# Altium PCB PCB1.PcbDoc
Units mm, origin at the board's own origin, x right, y up, seen from the top; angles counter-clockwise.
Board outline 46.45 x 39.85 mm, 4 copper layers (Top Layer, Int1 (GND), Int2 (PWR), Bottom Layer), stack 1.57 mm thick; 36 components, 27 nets, 175 pads, 20 vias.
Unrouted connection lines stored in the file: 1.
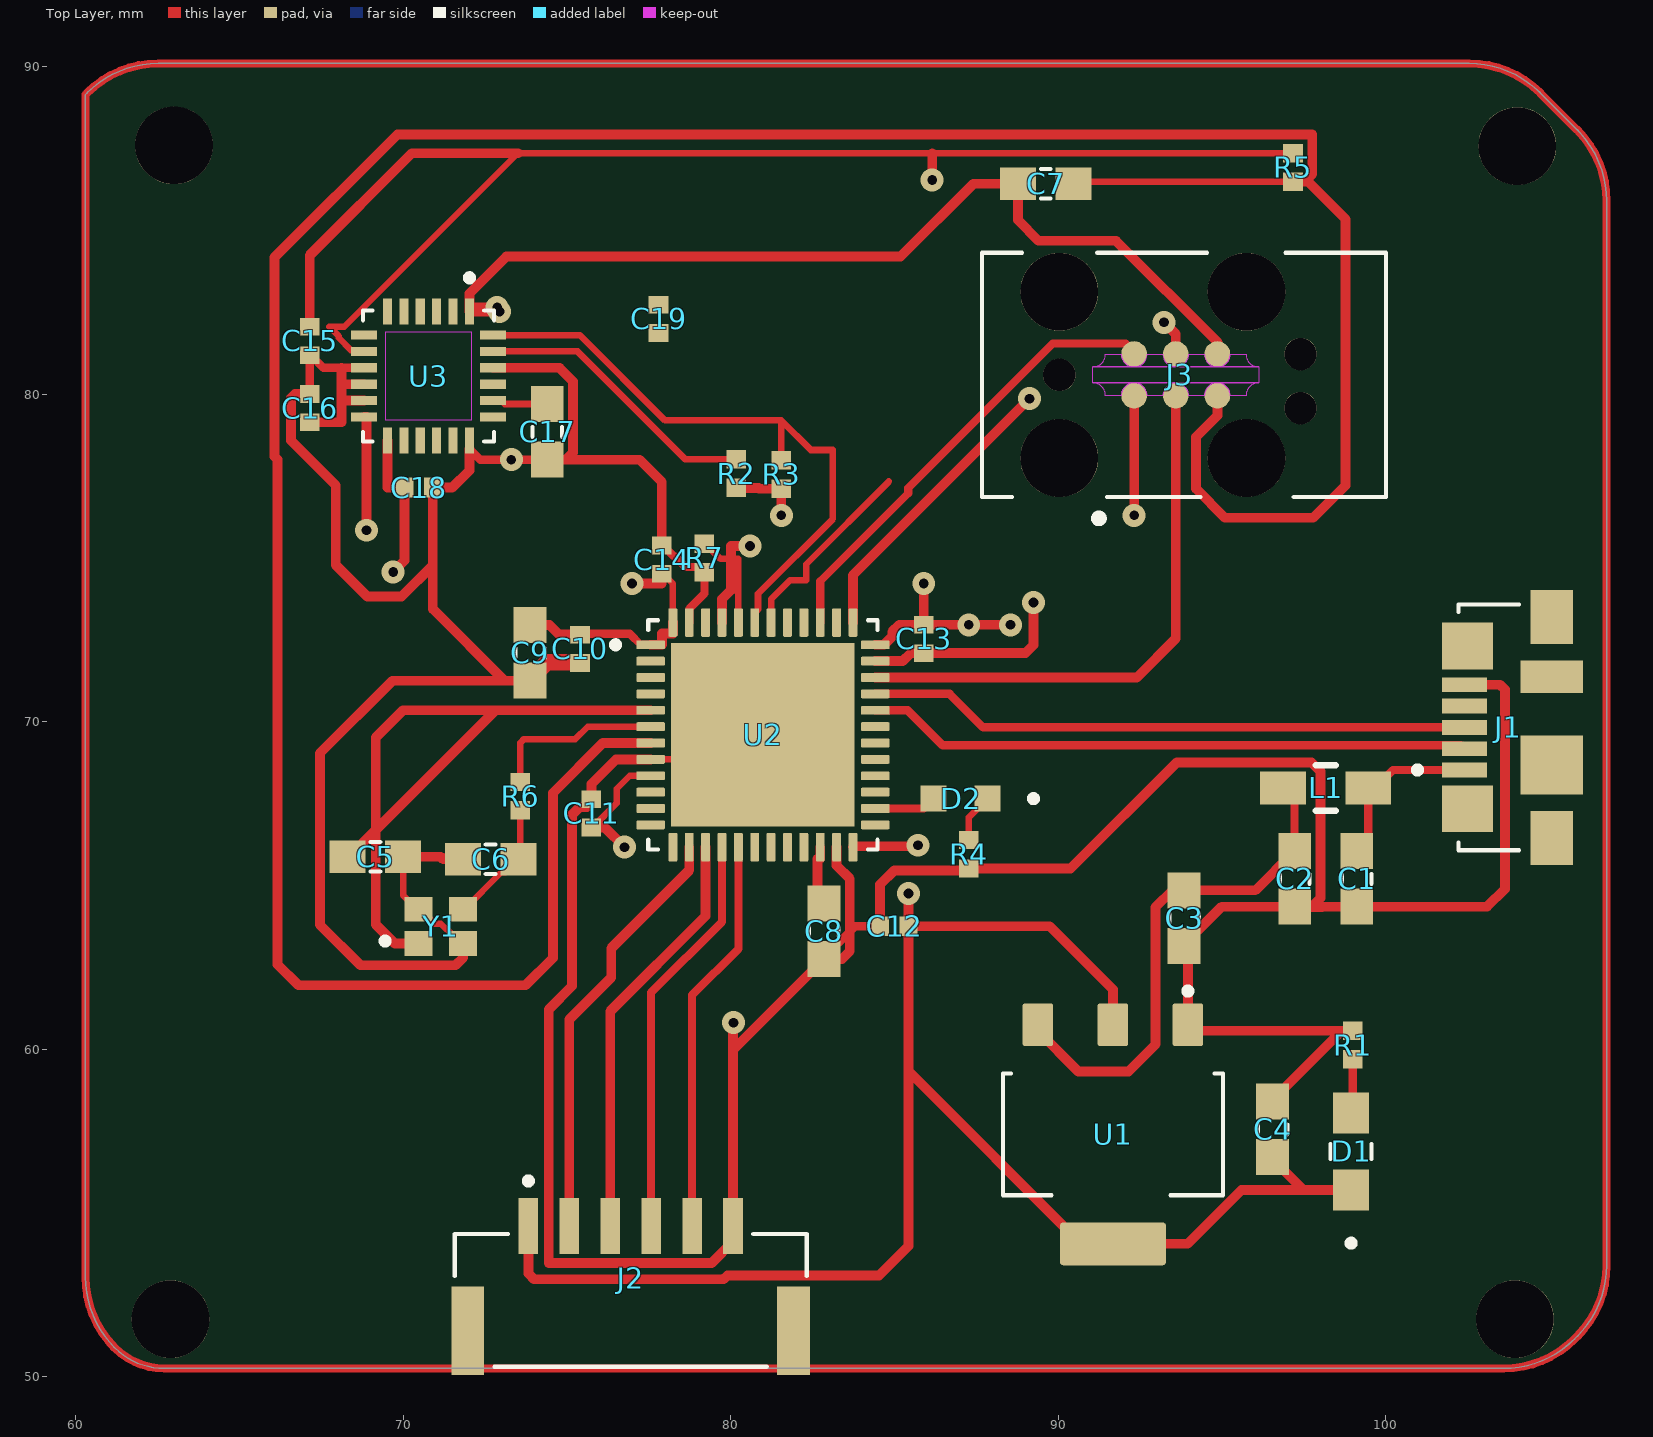
[diagram p0: Top Layer view]
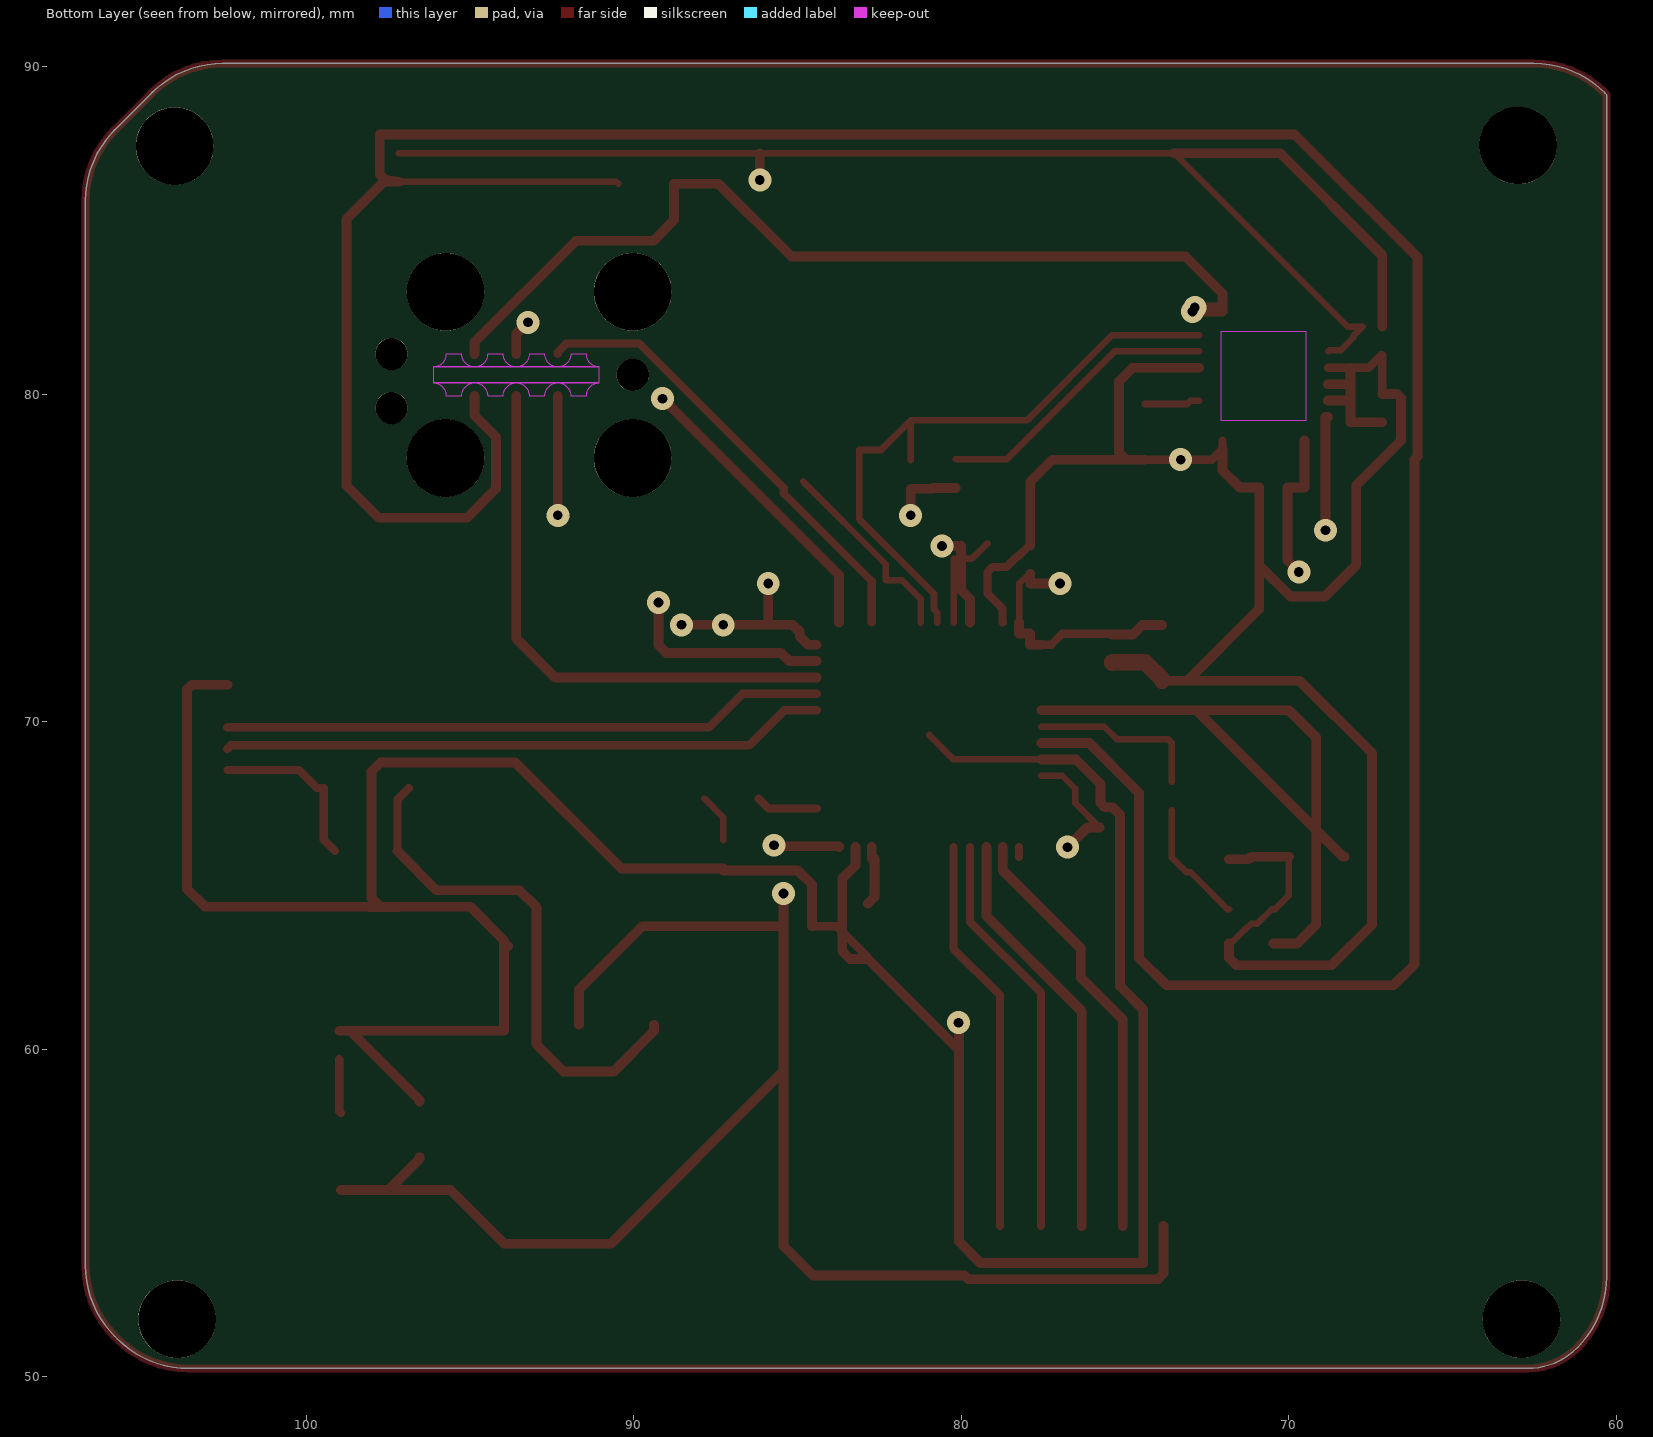
[diagram p1: Bottom Layer view, seen from below]
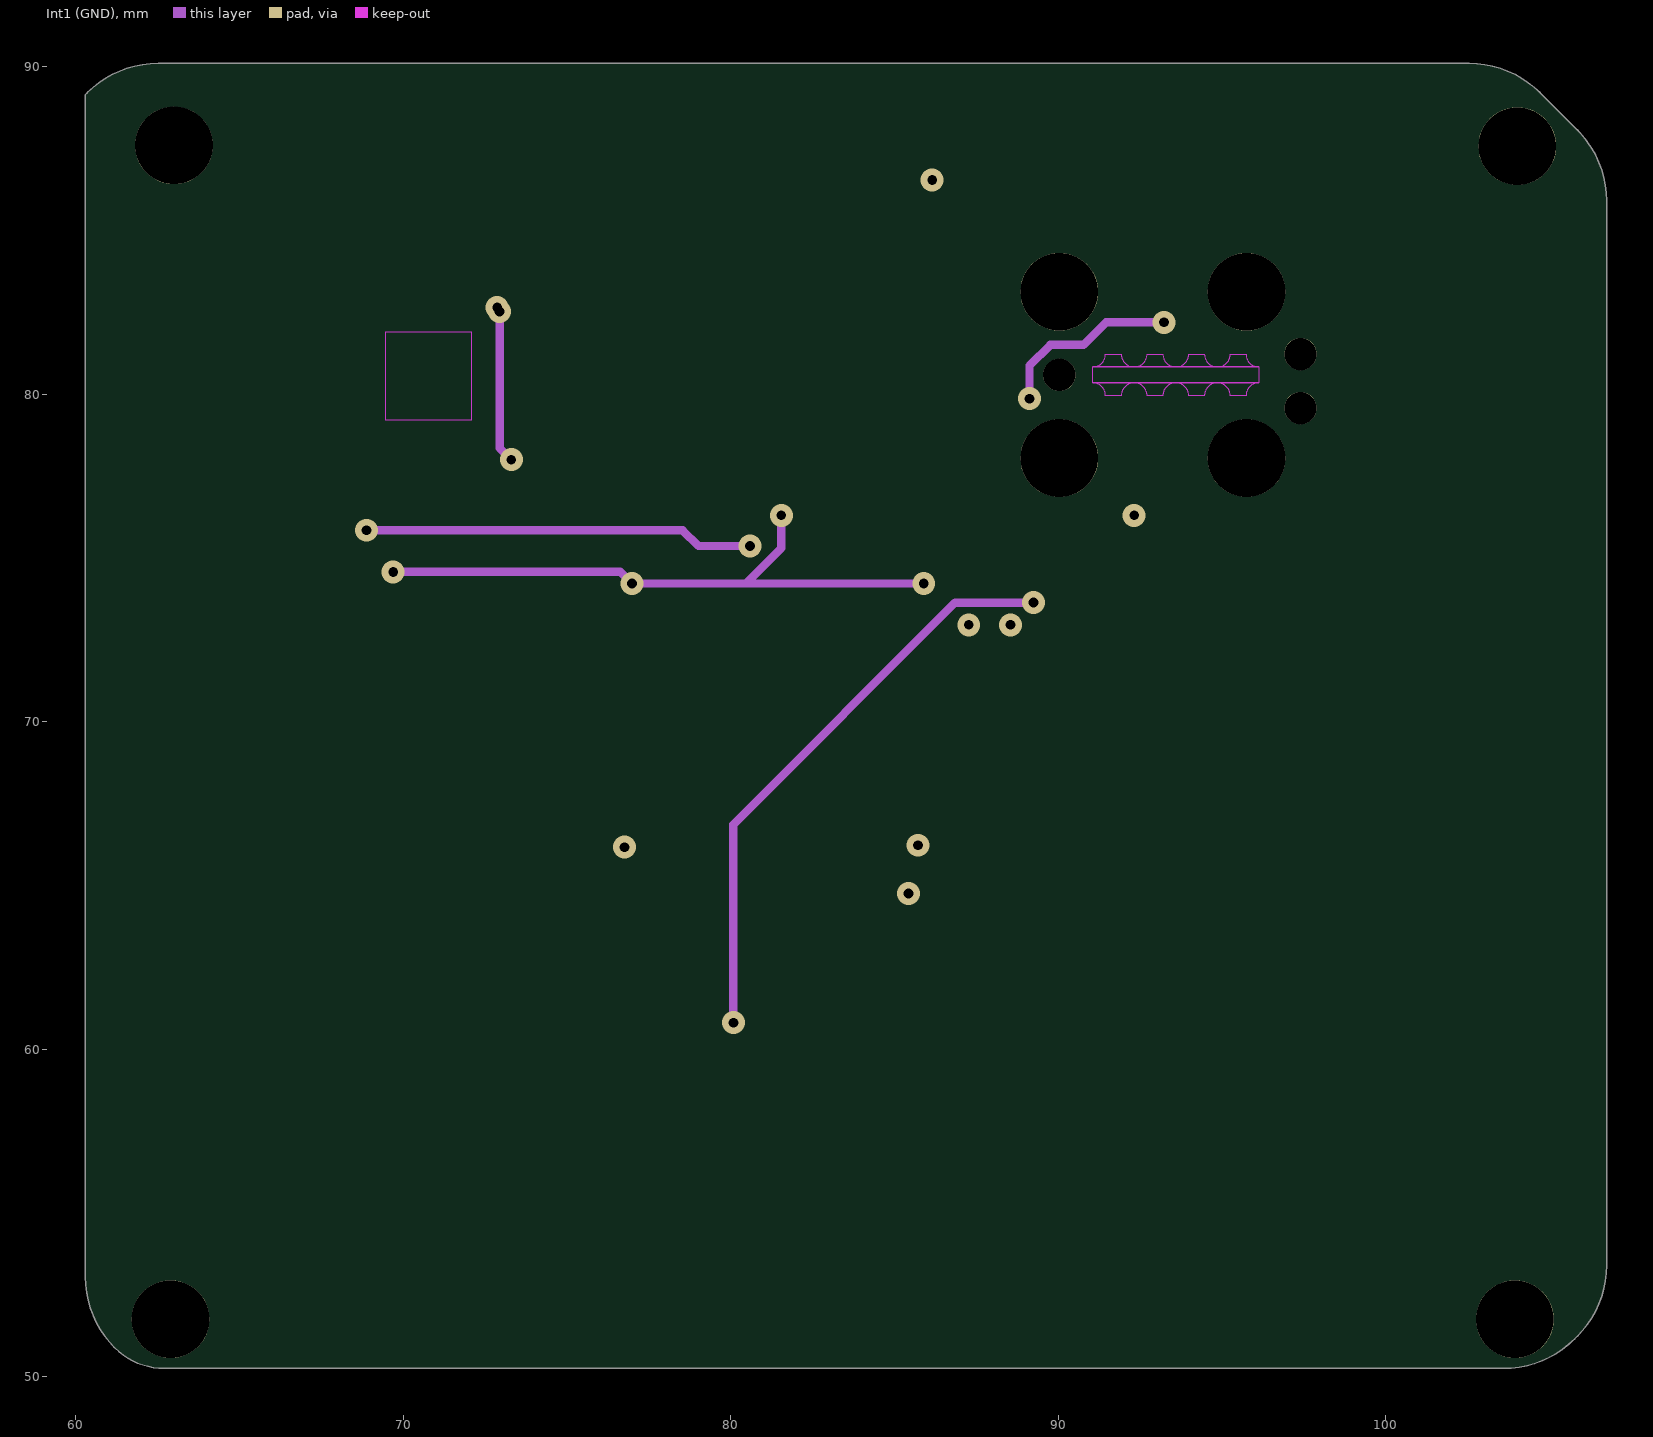
[diagram p2: Int1 (GND)]
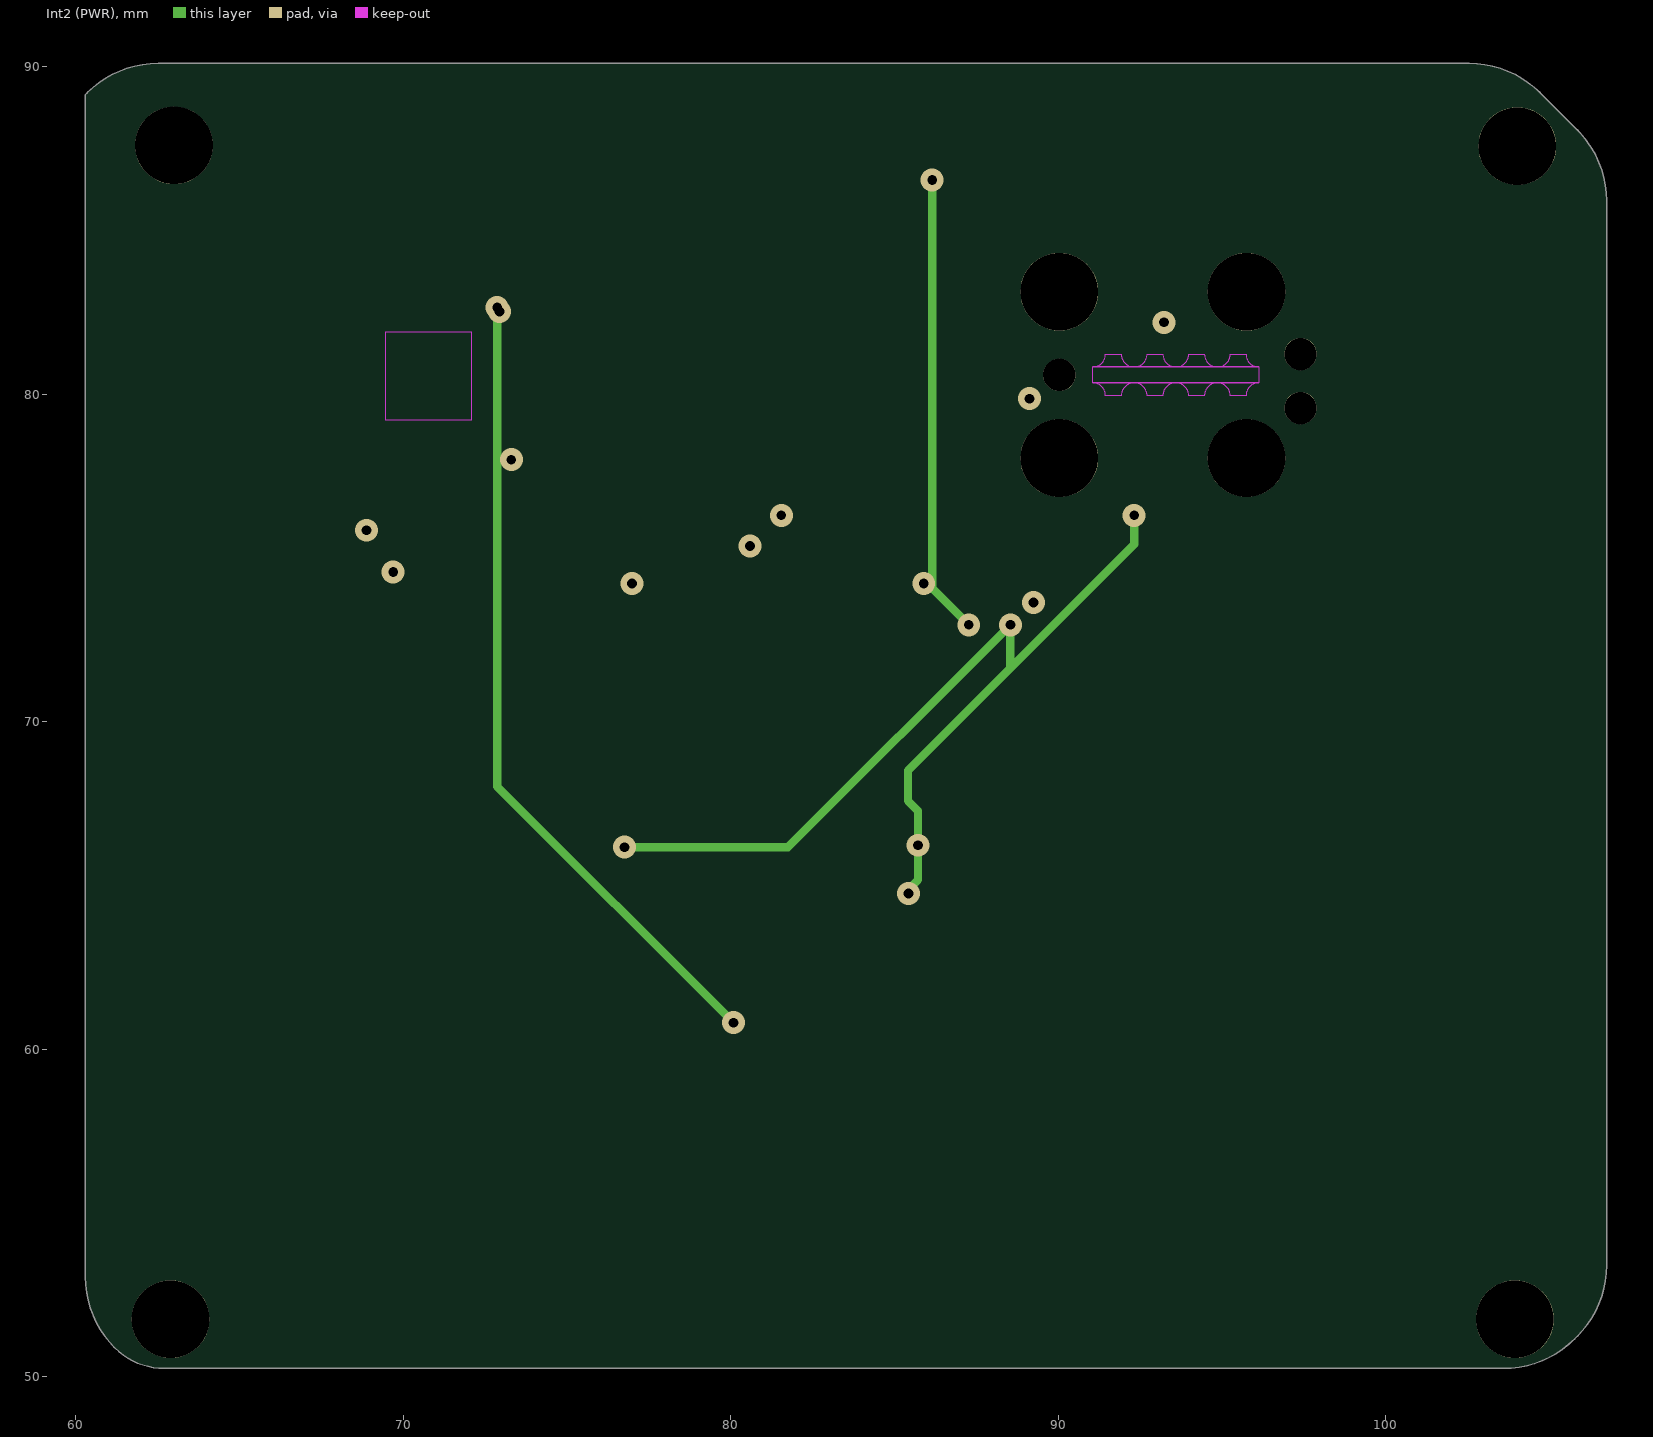
[diagram p3: Int2 (PWR)]
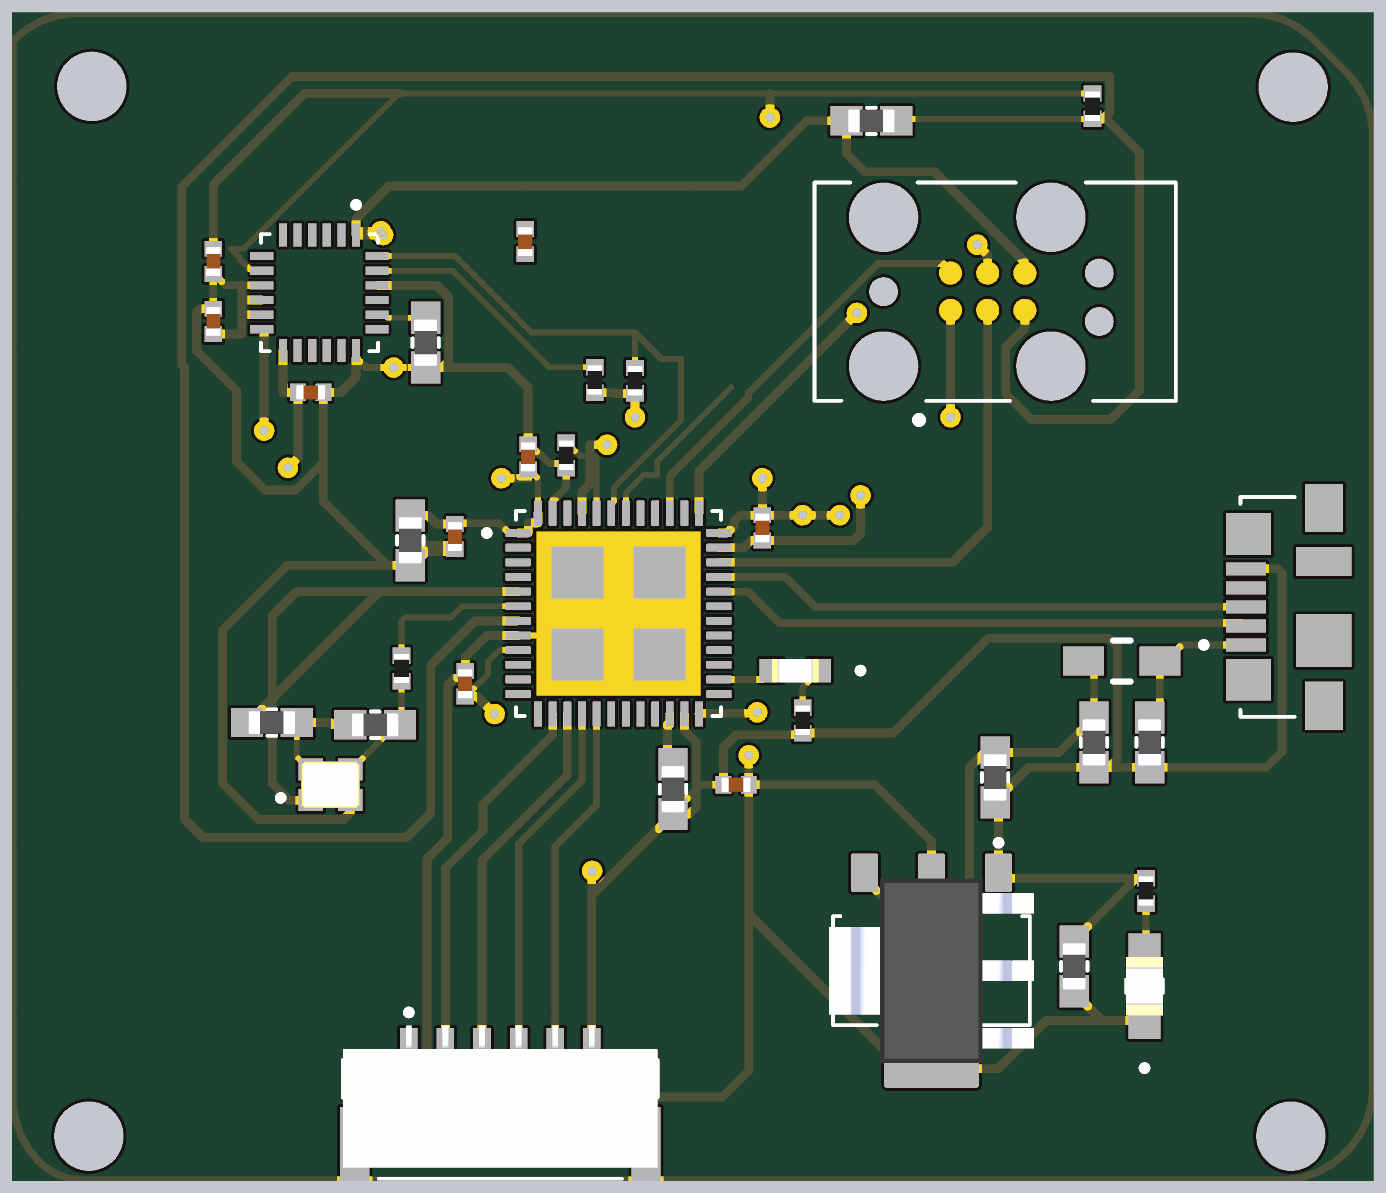
[diagram p4: 3D render of the assembled board from above, using the file's embedded part models]

## Layer stack, top to bottom
Top Solder: solder mask 0.0254, SM-001, Dk 4
Top Layer: signal copper 0.035
Dielectric 1: prepreg 0.2, PP-017, Dk 4.6
Int1 (GND): signal copper 0.0175
Dielectric 3: core 1.065, Core-039, Dk 4.6
Int2 (PWR): signal copper 0.0175
Dielectric 5: prepreg 0.2, PP-017, Dk 4.6
Bottom Layer: signal copper 0.035
Bottom Solder: solder mask 0.0254, SM-001, Dk 4

## Board outline
61.198,50.877 cw(c63.366,53.045) 60.3,53.045 60.3,89.15 60.352,89.202 cw(c62.52,87.034) 62.52,90.1 102.555,90.1 cw(c102.555,87.034) 104.723,89.202 105.852,88.073 cw(c103.684,85.905) 106.75,85.905 106.75,53.395 cw(c103.684,53.395) 105.852,51.227 105.773,51.148 cw(c103.605,53.316) 103.605,50.25 62.712,50.25 cw(c62.712,52.391)

## Design rules (kind name [scope] priority, off if disabled: settings)
Clearance [All] p1: gap=0.2 ignorepadtopadclearanceinfootprint=FALSE except(0.127: Arc-SMDPad Track-SMDPad SMDPad-SMDPad)
DiffPairsRouting [All] p1: maxlimit=0.254 minlimit=0.203 mostfreqgap=0.254 toplayer_maxgap=0.203 toplayer_prefgap=0.203 toplayer_minwidth=0.26 toplayer_maxwidth=0.26 toplayer_prefwidth=0.26 bottomlayer_maxgap=0.203 bottomlayer_prefgap=0.203 bottomlayer_minwidth=0.26 bottomlayer_maxwidth=0.26 bottomlayer_prefwidth=0.26 impedanceprofiledriven=TRUE impedanceprofileid={1C07F27B-55AD-48AA-B8D2-9EB6281B7EF9} impedanceprofilevalue=90.000000 maxuncoupledlength=12.7
PolygonConnect [All] p1: connectstyle=Direct reliefconductorwidth=0.254 reliefentries=4 polygonreliefangle="90 Angle" airgapwidth=0.254
RoutingVias [All] p1: holewidth=0.3 width=0.7 viastyle="Through Hole" minholewidth=0.25 minwidth=0.55 maxholewidth=0.4 maxwidth=0.9
SolderMaskExpansion [All] p1: expansion=0.102 istentingtop=FALSE
SupplyNets "Schematic Supply Nets_3" [InNet('GND')] p1: voltage=0.000
SupplyNets "Schematic Supply Nets_2" [InNet('+3v3')] p2: voltage=0.000
SupplyNets "Schematic Supply Nets_1" [InNet('VBUS')] p3: voltage=0.000
SupplyNets "Schematic Supply Nets" [InNet('+5')] p4: voltage=0.000
UnRoutedNet [All] p1: checkbadconnections=TRUE
Width [All] p1: maxlimit=1 minlimit=0.2 preferedwidth=0.3 midlayer1_minwidth=0.254 midlayer1_maxwidth=0.254 midlayer1_prefwidth=0.254 midlayer2_minwidth=0.254 midlayer2_maxwidth=0.254 midlayer2_prefwidth=0.254 minimp=50.000000 maximp=50.000000 favimp=50.000000
28 further rules are at their usual default settings.

## Classes and differential pairs
differential pair USB_D: +USB_D_P -USB_D_N

## Components (designator, comment, footprint, x,y, rotation, side; value= is the part's Value field where it differs from the comment)
C1 "2u2" CAPC1608X90 99.125,65.2 r90 top
C2 "2u2" CAPC1608X90 97.225,65.2 r90 top
C3 "22U" CAPC1608X90 93.85,64 r90 top
C4 "22U" CAPC1608X90 96.55,57.55 r270 top
C5 "10P" CAPC1608X90 69.15,65.875 r180 top
C6 "10p" CAPC1608X90 72.675,65.8 r0 top
C7 "2.2u" CAPC1608X90 89.625,86.425 r0 top
C8 "2u2" CAPC1608X90 82.85,63.6 r270 top
C9 "2u2" CAPC1608X90 73.875,72.1 r90 top
C10 "100n" CAPC1005X55N 75.4,72.225 r270 top
C11 "100n" CAPC1005X55N 75.75,67.2 r90 top
C12 "100n" CAPC1005X55N 85,63.75 r180 top
C13 "100n" CAPC1005X55N 85.9,72.525 r270 top
C14 "100n" CAPC1005X55N 77.9,74.95 r90 top
C15 "10n" CAPC1005X55N 67.15,81.625 r270 top
C16 "100n" CAPC1005X55N 67.15,79.575 r90 top
C17 "2u2" CAPC1608X90 74.4,78.85 r270 top
C18 "100n" CAPC1005X55N 70.475,77.15 r0 top
C19 "100n" CAPC1005X55N 77.8,82.3 r90 top (schematic designator C16)
D1 "XZMG54W-1" LED_XZMG54W-1 98.95,56.875 r90 top
D2 "KPT-1608EC" LED_KPT-1608EC 87.025,67.65 r180 top
J1 "47346-0001" MOLEX_47346-0001 105.075,69.825 r90 top
J2 "SM06B-GHS-TB" JST_SM06B-GHS-TB 76.95,52.725 r0 top
J3 "TC2030-IDC" TAG-CONNECT_TC2050-IDC 93.849,80.59 r0 top
L1 "WE-CBF_0805" WE-CBF_0805_W4.0 98.175,67.975 r180 top
R1 "1k" RESC1005X37N 99,60.125 r270 top
R2 "2k2" RESC1005X37N 80.175,77.575 r90 top
R3 "2k2" RESC1005X37N 81.55,77.55 r90 top
R4 "1k" RESC1005X37N 87.275,65.95 r90 top
R5 "10k" RESC1005X37N 97.175,86.925 r90 top
R6 "0R" RESC1005X37N 73.575,67.725 r270 top
R7 "10k" RESC1005X37N 79.2,75 r90 top
U1 "AMS1117-3.3" SOT229P700X180-4N 91.675,57.4 r180 top
U2 "STM32F411CEU6" QFN50P700X700X60-49N 80.988,69.598 r0 top
U3 "MPU-6050-A" QFN50P400X400X95-24N 70.775,80.555 r270 top
Y1 "ECS-240-6-37-JTN-TR" XTAL_ECS-240-6-37-JTN-TR 71.15,63.75 r0 top

## Footprints (in the part's own frame and the unit in brackets; to place one, negate y for a bottom-side part, rotate by r counter-clockwise, add the part's x,y. Pads: shape width x height; smd on the part's side, far side on the other; paste and mask are expansions set on the pad)
CAPC1005X55N [mm]
  rect 0.54x0.6 smd: 1(-0.432,0) 2(0.432,0)
  body extent -0.5,-0.25 0.5,0.25, height 0.55
CAPC1608X90 [mm]
  rect 1.1x1 smd paste+0 mask+0.102: 1(-0.85,0) 2(0.85,0)
  silkscreen extent -0.15,-0.45 0.15,0.45, body extent -0.8,-0.4 0.8,0.4, height 0.9
JST_SM06B-GHS-TB [mm]
  rect 0.6x1.7 smd paste+0 mask+0.102: 1(-3.125,1.875) 2(-1.875,1.875) 3(-0.625,1.875) 4(0.625,1.875) 5(1.875,1.875) 6(3.125,1.875)
  rect 1x2.7 smd paste+0 mask+0.102: MP1(-4.975,-1.325) MP2(4.975,-1.325)
  silkscreen extent -5.37,-2.42 5.38,3.35, body extent -5.38,-2.05 5.38,2.8, height 4.25
LED_KPT-1608EC [mm]
  rect 0.8x0.8 smd paste+0 mask+0.102: A(0.825,0) C(-0.825,0)
  silkscreen extent -2.32,-0.1 -2.13,0.1, body extent -0.8,-0.4 0.8,0.4, height 0.75
LED_XZMG54W-1 [mm]
  rect 1.25x1.1 smd: 1(-1.175,0) 2(1.175,0)
  silkscreen extent -2.9,-0.63 0.23,0.63, body extent -1,-0.63 1,0.63, height 0.75
MOLEX_47346-0001 [mm]
  rect 0.45x1.38 smd: 1(-1.3,2.66) 2(-0.65,2.66) 3(0,2.66) 4(0.65,2.66) 5(1.3,2.66)
  rect 1.425x1.55 smd: S1(-2.488,2.575) S2(2.487,2.575)
  rect 1.65x1.3 smd: S3(-3.375,0) S6(3.375,0)
  rect 1.8x1.9 smd: S4(-1.15,0)
  rect 1x1.9 smd: S5(1.55,0)
  silkscreen extent -3.75,1 3.75,4.2
QFN50P400X400X95-24N [mm]
  rect 0.79x0.28 smd: 1(-1.97,1.25) 2(-1.97,0.75) 3(-1.97,0.25) 4(-1.97,-0.25) 5(-1.97,-0.75) 6(-1.97,-1.25) 13(1.97,-1.25) 14(1.97,-0.75) 15(1.97,-0.25) 16(1.97,0.25) 17(1.97,0.75) 18(1.97,1.25)
  rect 0.28x0.79 smd: 7(-1.25,-1.97) 8(-0.75,-1.97) 9(-0.25,-1.97) 10(0.25,-1.97) 11(0.75,-1.97) 12(1.25,-1.97) 19(1.25,1.97) 20(0.75,1.97) 21(0.25,1.97) 22(-0.25,1.97) 23(-0.75,1.97) 24(-1.25,1.97)
  Keep-Out Layer region: 1.35,-1.3 -1.35,-1.3 -1.35,1.3 1.35,1.3
  silkscreen extent -3.1,-2 2,2
QFN50P700X700X60-49N [mm]
  rrect25% 0.87x0.27 smd: 1(-3.43,2.75) 2(-3.43,2.25) 3(-3.43,1.75) 4(-3.43,1.25) 5(-3.43,0.75) 6(-3.43,0.25) 7(-3.43,-0.25) 8(-3.43,-0.75) 9(-3.43,-1.25) 10(-3.43,-1.75) 11(-3.43,-2.25) 12(-3.43,-2.75) 25(3.43,-2.75) 26(3.43,-2.25) 27(3.43,-1.75) 28(3.43,-1.25) 29(3.43,-0.75) 30(3.43,-0.25) 31(3.43,0.25) 32(3.43,0.75) 33(3.43,1.25) 34(3.43,1.75) 35(3.43,2.25) 36(3.43,2.75)
  rrect25% 0.27x0.87 smd: 13(-2.75,-3.43) 14(-2.25,-3.43) 15(-1.75,-3.43) 16(-1.25,-3.43) 17(-0.75,-3.43) 18(-0.25,-3.43) 19(0.25,-3.43) 20(0.75,-3.43) 21(1.25,-3.43) 22(1.75,-3.43) 23(2.25,-3.43) 24(2.75,-3.43) 37(2.75,3.43) 38(2.25,3.43) 39(1.75,3.43) 40(1.25,3.43) 41(0.75,3.43) 42(0.25,3.43) 43(-0.25,3.43) 44(-0.75,3.43) 45(-1.25,3.43) 46(-1.75,3.43) 47(-2.25,3.43) 48(-2.75,3.43)
  rect 5.6x5.6 smd paste-4: 49(0,0)
  silkscreen extent -4.6,-3.5 3.5,3.5
RESC1005X37N [mm]
  rect 0.56x0.6 smd: 1(-0.435,0) 2(0.435,0)
  body extent -0.5,-0.25 0.5,0.25, height 0.37
SOT229P700X180-4N [mm]
  rrect15% 0.93x1.31 smd: 1(-2.29,-3.345) 2(0,-3.345) 3(2.29,-3.345)
  rrect15% 3.24x1.31 smd: 4(0,3.345)
  silkscreen extent -3.36,-4.47 3.36,1.86, body extent -3.5,-3.15 3.5,3.15, height 1.8
TAG-CONNECT_TC2050-IDC [mil]
  round 31 smd paste-39.37: 1(-60,-25) 2(-10,-25) 3(40,-25) 4(-10,25) 5(40,25) 6(-60,25)
  round 93.5 hole 93.5 unplated: ""(-150,-100) ""(-150,100) ""(75,-100) ""(75,100)
  round 39 hole 39 unplated: ""(-150,0) ""(140,-40) ""(140,25)
  Keep-Out Layer region: -60.83,-9.53 -61.61,-9.57 -62.44,-9.68 -63.23,-9.84 -64.02,-10.04 -64.8,-10.28 -65.55,-10.51 -66.3,-10.83 -67.05,-11.18 -67.76,-11.57 -68.43,-12.01 -69.09,-12.44 -69.76,-12.95 -70.35,-13.46 -70.94,-14.06 -71.54,-14.65 -72.05,-15.24 -72.56,-15.91 -72.99,-16.57 -73.43,-17.24 -73.82,-17.95 -74.17,-18.7 -74.49,-19.45 -74.72,-20.2 -74.96,-20.98 -75.16,-21.77 -75.32,-22.56 -75.43,-23.39 -75.47,-24.17 -75.51,-25 -94.49,-25 -94.53,-24.17 -94.57,-23.39 -94.69,-22.56 -94.84,-21.77 -95.04,-20.98 -95.28,-20.2 -95.51,-19.45 -95.83,-18.7 -96.18,-17.95 -96.57,-17.24 -97.01,-16.57 -97.44,-15.91 -97.95,-15.24 -98.46,-14.65 -99.06,-14.06 -99.65,-13.46 -100.24,-12.95 -100.91,-12.44 -101.57,-12.01 -102.24,-11.57 -102.95,-11.18 -103.7,-10.83 -104.45,-10.51 -105.2,-10.28 -105.98,-10.04 -106.77,-9.84 -107.56,-9.68 -108.39,-9.57 -109.17,-9.53 -109.75,-9.5 -110,-9.5 -110,-9.49 -109.75,-9.5 -60,-9.49
  Keep-Out Layer region: -10.83,-9.53 -11.61,-9.57 -12.44,-9.68 -13.23,-9.84 -14.02,-10.04 -14.8,-10.28 -15.55,-10.51 -16.3,-10.83 -17.05,-11.18 -17.76,-11.57 -18.43,-12.01 -19.09,-12.44 -19.76,-12.95 -20.35,-13.46 -20.94,-14.06 -21.54,-14.65 -22.05,-15.24 -22.56,-15.91 -22.99,-16.57 -23.43,-17.24 -23.82,-17.95 -24.17,-18.7 -24.49,-19.45 -24.72,-20.2 -24.96,-20.98 -25.16,-21.77 -25.32,-22.56 -25.43,-23.39 -25.47,-24.17 -25.51,-25 -44.49,-25 -44.53,-24.17 -44.57,-23.39 -44.69,-22.56 -44.84,-21.77 -45.04,-20.98 -45.28,-20.2 -45.51,-19.45 -45.83,-18.7 -46.18,-17.95 -46.57,-17.24 -47.01,-16.57 -47.44,-15.91 -47.95,-15.24 -48.46,-14.65 -49.06,-14.06 -49.65,-13.46 -50.24,-12.95 -50.91,-12.44 -51.57,-12.01 -52.24,-11.57 -52.95,-11.18 -53.7,-10.83 -54.45,-10.51 -55.2,-10.28 -55.98,-10.04 -56.77,-9.84 -57.56,-9.68 -58.39,-9.57 -59.17,-9.53 -59.75,-9.5 -60,-9.5 -60,-9.49 -59.75,-9.5 -10,-9.49
  Keep-Out Layer region: 89.17,-9.53 88.39,-9.57 87.56,-9.68 86.77,-9.84 85.98,-10.04 85.2,-10.28 84.45,-10.51 83.7,-10.83 82.95,-11.18 82.24,-11.57 81.57,-12.01 80.91,-12.44 80.24,-12.95 79.65,-13.46 79.06,-14.06 78.46,-14.65 77.95,-15.24 77.44,-15.91 77.01,-16.57 76.57,-17.24 76.18,-17.95 75.83,-18.7 75.51,-19.45 75.28,-20.2 75.04,-20.98 74.84,-21.77 74.68,-22.56 74.57,-23.39 74.53,-24.17 74.49,-25 55.51,-25 55.47,-24.17 55.43,-23.39 55.31,-22.56 55.16,-21.77 54.96,-20.98 54.72,-20.2 54.49,-19.45 54.17,-18.7 53.82,-17.95 53.43,-17.24 52.99,-16.57 52.56,-15.91 52.05,-15.24 51.54,-14.65 50.94,-14.06 50.35,-13.46 49.76,-12.95 49.09,-12.44 48.43,-12.01 47.76,-11.57 47.05,-11.18 46.3,-10.83 45.55,-10.51 44.8,-10.28 44.02,-10.04 43.23,-9.84 42.44,-9.68 41.61,-9.57 40.83,-9.53 40.25,-9.5 40,-9.5 40,-9.49 40.25,-9.5 90,-9.49
  Keep-Out Layer region: 39.17,-9.53 38.39,-9.57 37.56,-9.68 36.77,-9.84 35.98,-10.04 35.2,-10.28 34.45,-10.51 33.7,-10.83 32.95,-11.18 32.24,-11.57 31.57,-12.01 30.91,-12.44 30.24,-12.95 29.65,-13.46 29.06,-14.06 28.46,-14.65 27.95,-15.24 27.44,-15.91 27.01,-16.57 26.57,-17.24 26.18,-17.95 25.83,-18.7 25.51,-19.45 25.28,-20.2 25.04,-20.98 24.84,-21.77 24.68,-22.56 24.57,-23.39 24.53,-24.17 24.49,-25 5.51,-25 5.47,-24.17 5.43,-23.39 5.31,-22.56 5.16,-21.77 4.96,-20.98 4.72,-20.2 4.49,-19.45 4.17,-18.7 3.82,-17.95 3.43,-17.24 2.99,-16.57 2.56,-15.91 2.05,-15.24 1.54,-14.65 0.94,-14.06 0.35,-13.46 -0.24,-12.95 -0.91,-12.44 -1.57,-12.01 -2.24,-11.57 -2.95,-11.18 -3.7,-10.83 -4.45,-10.51 -5.2,-10.28 -5.98,-10.04 -6.77,-9.84 -7.56,-9.68 -8.39,-9.57 -9.17,-9.53 -9.75,-9.5 -10,-9.5 -10,-9.49 -9.75,-9.5 40,-9.49
  Keep-Out Layer region: 24.53,24.17 24.57,23.39 24.68,22.56 24.84,21.77 25.04,20.98 25.28,20.2 25.51,19.45 25.83,18.7 26.18,17.95 26.57,17.24 27.01,16.57 27.44,15.91 27.95,15.24 28.46,14.65 29.06,14.06 29.65,13.46 30.24,12.95 30.91,12.44 31.57,12.01 32.24,11.57 32.95,11.18 33.7,10.83 34.45,10.51 35.2,10.28 35.98,10.04 36.77,9.84 37.56,9.68 38.39,9.57 39.17,9.53 39.75,9.5 40,9.5 40,9.49 39.75,9.5 -10,9.49 -9.17,9.53 -8.39,9.57 -7.56,9.68 -6.77,9.84 -5.98,10.04 -5.2,10.28 -4.45,10.51 -3.7,10.83 -2.95,11.18 -2.24,11.57 -1.57,12.01 -0.91,12.44 -0.24,12.95 0.35,13.46 0.94,14.06 1.54,14.65 2.05,15.24 2.56,15.91 2.99,16.57 3.43,17.24 3.82,17.95 4.17,18.7 4.49,19.45 4.72,20.2 4.96,20.98 5.16,21.77 5.31,22.56 5.43,23.39 5.47,24.17 5.51,25 24.49,25
  Keep-Out Layer region: 74.53,24.17 74.57,23.39 74.68,22.56 74.84,21.77 75.04,20.98 75.28,20.2 75.51,19.45 75.83,18.7 76.18,17.95 76.57,17.24 77.01,16.57 77.44,15.91 77.95,15.24 78.46,14.65 79.06,14.06 79.65,13.46 80.24,12.95 80.91,12.44 81.57,12.01 82.24,11.57 82.95,11.18 83.7,10.83 84.45,10.51 85.2,10.28 85.98,10.04 86.77,9.84 87.56,9.68 88.39,9.57 89.17,9.53 89.75,9.5 90,9.5 90,9.49 89.75,9.5 40,9.49 40.83,9.53 41.61,9.57 42.44,9.68 43.23,9.84 44.02,10.04 44.8,10.28 45.55,10.51 46.3,10.83 47.05,11.18 47.76,11.57 48.43,12.01 49.09,12.44 49.76,12.95 50.35,13.46 50.94,14.06 51.54,14.65 52.05,15.24 52.56,15.91 52.99,16.57 53.43,17.24 53.82,17.95 54.17,18.7 54.49,19.45 54.72,20.2 54.96,20.98 55.16,21.77 55.31,22.56 55.43,23.39 55.47,24.17 55.51,25 74.49,25
  Keep-Out Layer region: 90,-9.5 -110,-9.5 -110,0 -110,9.5 90,9.5
  Keep-Out Layer region: -60.83,-9.53 -61.61,-9.57 -62.44,-9.68 -63.23,-9.84 -64.02,-10.04 -64.8,-10.28 -65.55,-10.51 -66.3,-10.83 -67.05,-11.18 -67.76,-11.57 -68.43,-12.01 -69.09,-12.44 -69.76,-12.95 -70.35,-13.46 -70.94,-14.06 -71.54,-14.65 -72.05,-15.24 -72.56,-15.91 -72.99,-16.57 -73.43,-17.24 -73.82,-17.95 -74.17,-18.7 -74.49,-19.45 -74.72,-20.2 -74.96,-20.98 -75.16,-21.77 -75.32,-22.56 -75.43,-23.39 -75.47,-24.17 -75.51,-25 -94.49,-25 -94.53,-24.17 -94.57,-23.39 -94.69,-22.56 -94.84,-21.77 -95.04,-20.98 -95.28,-20.2 -95.51,-19.45 -95.83,-18.7 -96.18,-17.95 -96.57,-17.24 -97.01,-16.57 -97.44,-15.91 -97.95,-15.24 -98.46,-14.65 -99.06,-14.06 -99.65,-13.46 -100.24,-12.95 -100.91,-12.44 -101.57,-12.01 -102.24,-11.57 -102.95,-11.18 -103.7,-10.83 -104.45,-10.51 -105.2,-10.28 -105.98,-10.04 -106.77,-9.84 -107.56,-9.68 -108.39,-9.57 -109.17,-9.53 -109.75,-9.5 -110,-9.5 -110,-9.49 -109.75,-9.5 -60,-9.49
  Keep-Out Layer region: -10.83,-9.53 -11.61,-9.57 -12.44,-9.68 -13.23,-9.84 -14.02,-10.04 -14.8,-10.28 -15.55,-10.51 -16.3,-10.83 -17.05,-11.18 -17.76,-11.57 -18.43,-12.01 -19.09,-12.44 -19.76,-12.95 -20.35,-13.46 -20.94,-14.06 -21.54,-14.65 -22.05,-15.24 -22.56,-15.91 -22.99,-16.57 -23.43,-17.24 -23.82,-17.95 -24.17,-18.7 -24.49,-19.45 -24.72,-20.2 -24.96,-20.98 -25.16,-21.77 -25.32,-22.56 -25.43,-23.39 -25.47,-24.17 -25.51,-25 -44.49,-25 -44.53,-24.17 -44.57,-23.39 -44.69,-22.56 -44.84,-21.77 -45.04,-20.98 -45.28,-20.2 -45.51,-19.45 -45.83,-18.7 -46.18,-17.95 -46.57,-17.24 -47.01,-16.57 -47.44,-15.91 -47.95,-15.24 -48.46,-14.65 -49.06,-14.06 -49.65,-13.46 -50.24,-12.95 -50.91,-12.44 -51.57,-12.01 -52.24,-11.57 -52.95,-11.18 -53.7,-10.83 -54.45,-10.51 -55.2,-10.28 -55.98,-10.04 -56.77,-9.84 -57.56,-9.68 -58.39,-9.57 -59.17,-9.53 -59.75,-9.5 -60,-9.5 -60,-9.49 -59.75,-9.5 -10,-9.49
  Keep-Out Layer region: 89.17,-9.53 88.39,-9.57 87.56,-9.68 86.77,-9.84 85.98,-10.04 85.2,-10.28 84.45,-10.51 83.7,-10.83 82.95,-11.18 82.24,-11.57 81.57,-12.01 80.91,-12.44 80.24,-12.95 79.65,-13.46 79.06,-14.06 78.46,-14.65 77.95,-15.24 77.44,-15.91 77.01,-16.57 76.57,-17.24 76.18,-17.95 75.83,-18.7 75.51,-19.45 75.28,-20.2 75.04,-20.98 74.84,-21.77 74.68,-22.56 74.57,-23.39 74.53,-24.17 74.49,-25 55.51,-25 55.47,-24.17 55.43,-23.39 55.31,-22.56 55.16,-21.77 54.96,-20.98 54.72,-20.2 54.49,-19.45 54.17,-18.7 53.82,-17.95 53.43,-17.24 52.99,-16.57 52.56,-15.91 52.05,-15.24 51.54,-14.65 50.94,-14.06 50.35,-13.46 49.76,-12.95 49.09,-12.44 48.43,-12.01 47.76,-11.57 47.05,-11.18 46.3,-10.83 45.55,-10.51 44.8,-10.28 44.02,-10.04 43.23,-9.84 42.44,-9.68 41.61,-9.57 40.83,-9.53 40.25,-9.5 40,-9.5 40,-9.49 40.25,-9.5 90,-9.49
  Keep-Out Layer region: 39.17,-9.53 38.39,-9.57 37.56,-9.68 36.77,-9.84 35.98,-10.04 35.2,-10.28 34.45,-10.51 33.7,-10.83 32.95,-11.18 32.24,-11.57 31.57,-12.01 30.91,-12.44 30.24,-12.95 29.65,-13.46 29.06,-14.06 28.46,-14.65 27.95,-15.24 27.44,-15.91 27.01,-16.57 26.57,-17.24 26.18,-17.95 25.83,-18.7 25.51,-19.45 25.28,-20.2 25.04,-20.98 24.84,-21.77 24.68,-22.56 24.57,-23.39 24.53,-24.17 24.49,-25 5.51,-25 5.47,-24.17 5.43,-23.39 5.31,-22.56 5.16,-21.77 4.96,-20.98 4.72,-20.2 4.49,-19.45 4.17,-18.7 3.82,-17.95 3.43,-17.24 2.99,-16.57 2.56,-15.91 2.05,-15.24 1.54,-14.65 0.94,-14.06 0.35,-13.46 -0.24,-12.95 -0.91,-12.44 -1.57,-12.01 -2.24,-11.57 -2.95,-11.18 -3.7,-10.83 -4.45,-10.51 -5.2,-10.28 -5.98,-10.04 -6.77,-9.84 -7.56,-9.68 -8.39,-9.57 -9.17,-9.53 -9.75,-9.5 -10,-9.5 -10,-9.49 -9.75,-9.5 40,-9.49
  Keep-Out Layer region: 24.53,24.17 24.57,23.39 24.68,22.56 24.84,21.77 25.04,20.98 25.28,20.2 25.51,19.45 25.83,18.7 26.18,17.95 26.57,17.24 27.01,16.57 27.44,15.91 27.95,15.24 28.46,14.65 29.06,14.06 29.65,13.46 30.24,12.95 30.91,12.44 31.57,12.01 32.24,11.57 32.95,11.18 33.7,10.83 34.45,10.51 35.2,10.28 35.98,10.04 36.77,9.84 37.56,9.68 38.39,9.57 39.17,9.53 39.75,9.5 40,9.5 40,9.49 39.75,9.5 -10,9.49 -9.17,9.53 -8.39,9.57 -7.56,9.68 -6.77,9.84 -5.98,10.04 -5.2,10.28 -4.45,10.51 -3.7,10.83 -2.95,11.18 -2.24,11.57 -1.57,12.01 -0.91,12.44 -0.24,12.95 0.35,13.46 0.94,14.06 1.54,14.65 2.05,15.24 2.56,15.91 2.99,16.57 3.43,17.24 3.82,17.95 4.17,18.7 4.49,19.45 4.72,20.2 4.96,20.98 5.16,21.77 5.31,22.56 5.43,23.39 5.47,24.17 5.51,25 24.49,25
  Keep-Out Layer region: 74.53,24.17 74.57,23.39 74.68,22.56 74.84,21.77 75.04,20.98 75.28,20.2 75.51,19.45 75.83,18.7 76.18,17.95 76.57,17.24 77.01,16.57 77.44,15.91 77.95,15.24 78.46,14.65 79.06,14.06 79.65,13.46 80.24,12.95 80.91,12.44 81.57,12.01 82.24,11.57 82.95,11.18 83.7,10.83 84.45,10.51 85.2,10.28 85.98,10.04 86.77,9.84 87.56,9.68 88.39,9.57 89.17,9.53 89.75,9.5 90,9.5 90,9.49 89.75,9.5 40,9.49 40.83,9.53 41.61,9.57 42.44,9.68 43.23,9.84 44.02,10.04 44.8,10.28 45.55,10.51 46.3,10.83 47.05,11.18 47.76,11.57 48.43,12.01 49.09,12.44 49.76,12.95 50.35,13.46 50.94,14.06 51.54,14.65 52.05,15.24 52.56,15.91 52.99,16.57 53.43,17.24 53.82,17.95 54.17,18.7 54.49,19.45 54.72,20.2 54.96,20.98 55.16,21.77 55.31,22.56 55.43,23.39 55.47,24.17 55.51,25 74.49,25
  Keep-Out Layer region: -75.47,24.17 -75.43,23.39 -75.32,22.56 -75.16,21.77 -74.96,20.98 -74.72,20.2 -74.49,19.45 -74.17,18.7 -73.82,17.95 -73.43,17.24 -72.99,16.57 -72.56,15.91 -72.05,15.24 -71.54,14.65 -70.94,14.06 -70.35,13.46 -69.76,12.95 -69.09,12.44 -68.43,12.01 -67.76,11.57 -67.05,11.18 -66.3,10.83 -65.55,10.51 -64.8,10.28 -64.02,10.04 -63.23,9.84 -62.44,9.68 -61.61,9.57 -60.83,9.53 -60.25,9.5 -60,9.5 -60,9.49 -60.25,9.5 -110,9.49 -109.17,9.53 -108.39,9.57 -107.56,9.68 -106.77,9.84 -105.98,10.04 -105.2,10.28 -104.45,10.51 -103.7,10.83 -102.95,11.18 -102.24,11.57 -101.57,12.01 -100.91,12.44 -100.24,12.95 -99.65,13.46 -99.06,14.06 -98.46,14.65 -97.95,15.24 -97.44,15.91 -97.01,16.57 -96.57,17.24 -96.18,17.95 -95.83,18.7 -95.51,19.45 -95.28,20.2 -95.04,20.98 -94.84,21.77 -94.69,22.56 -94.57,23.39 -94.53,24.17 -94.49,25 -75.51,25
  Keep-Out Layer region: -25.47,24.17 -25.43,23.39 -25.32,22.56 -25.16,21.77 -24.96,20.98 -24.72,20.2 -24.49,19.45 -24.17,18.7 -23.82,17.95 -23.43,17.24 -22.99,16.57 -22.56,15.91 -22.05,15.24 -21.54,14.65 -20.94,14.06 -20.35,13.46 -19.76,12.95 -19.09,12.44 -18.43,12.01 -17.76,11.57 -17.05,11.18 -16.3,10.83 -15.55,10.51 -14.8,10.28 -14.02,10.04 -13.23,9.84 -12.44,9.68 -11.61,9.57 -10.83,9.53 -10.25,9.5 -10,9.5 -10,9.49 -10.25,9.5 -60,9.49 -59.17,9.53 -58.39,9.57 -57.56,9.68 -56.77,9.84 -55.98,10.04 -55.2,10.28 -54.45,10.51 -53.7,10.83 -52.95,11.18 -52.24,11.57 -51.57,12.01 -50.91,12.44 -50.24,12.95 -49.65,13.46 -49.06,14.06 -48.46,14.65 -47.95,15.24 -47.44,15.91 -47.01,16.57 -46.57,17.24 -46.18,17.95 -45.83,18.7 -45.51,19.45 -45.28,20.2 -45.04,20.98 -44.84,21.77 -44.69,22.56 -44.57,23.39 -44.53,24.17 -44.49,25 -25.51,25
  silkscreen extent -243,-177 243,147
WE-CBF_0805_W4.0 [mm]
  rect 1.4x1 smd: 1(-1.3,0) 2(1.3,0)
  silkscreen extent -0.3,-0.7 0.3,0.7
XTAL_ECS-240-6-37-JTN-TR [mm]
  rect 0.85x0.75 smd paste+0 mask+0.102: 1(-0.675,-0.525) 2(0.675,-0.525) 3(0.675,0.525) 4(-0.675,0.525)
  silkscreen extent -1.8,-0.55 -1.6,-0.35, body extent -1,-0.8 1,0.8, height 0.55

## Part data
C1 C2 C3 C4 C7 C8 C9 C17: library part CC0603KRX5R7BB225, "2.2 ÂµF Â±10% 16V Ceramic Capacitor X5R 0603 (1608 Metric)", Package="0603 Yageo", Check_prices=https://www.snapeda.com/parts/CC0603KRX5R7BB225/Yageo/view-part/?ref=eda, MF=Yageo, MP=CC0603KRX5R7BB225, SnapEDA_Link=https://www.snapeda.com/parts/CC0603KRX5R7BB225/Yageo/view-part/?ref=snap
C5 C6: library part CC0603KRX5R7BB225, "10pF Â±10% 16V Ceramic Capacitor X5R 0603 (1608 Metric)", Package="0603 Yageo", Check_prices=https://www.snapeda.com/parts/CC0603KRX5R7BB225/Yageo/view-part/?ref=eda, MF=Yageo, MP=CC0603KRX5R7BB225, SnapEDA_Link=https://www.snapeda.com/parts/CC0603KRX5R7BB225/Yageo/view-part/?ref=snap
C10 C11 C12 C13 C14 C15 C16 C18 C19: library part GJM1555C1HR10BB01J, "SMD Capacitor C0G(EIA) with Capacitance: 0.10pF Tol. 0.1pF. Rated Voltage: 50Vdc", Package="1005 Taiyo Yuden", Check_prices=https://www.snapeda.com/parts/GJM1555C1HR10BB01J/Murata/view-part/?ref=eda, MF=Murata, MP=GJM1555C1HR10BB01J, SnapEDA_Link=https://www.snapeda.com/parts/GJM1555C1HR10BB01J/Murata/view-part/?ref=snap
D1: "Green 568nm LED Indication - Discrete 2.2V 0805 (2012 Metric)", Package=None, Availability="In Stock", Check_prices=https://www.snapeda.com/parts/XZMG54W-1/SunLED/view-part/?ref=eda, MF=SunLED, MP=XZMG54W-1, Price=None, Purchase-URL=https://pricing.snapeda.com/search/part/XZMG54W-1/?ref=eda, SnapEDA_Link=https://www.snapeda.com/parts/XZMG54W-1/SunLED/view-part/?ref=snap
D2: "Red Chip LED 1.6x0.8mm", Package=Package, Check_prices=https://www.snapeda.com/parts/KPT-1608EC/Kingbright/view-part/?ref=eda, MF=Kingbright, MP=KPT-1608EC, SnapEDA_Link=https://www.snapeda.com/parts/KPT-1608EC/Kingbright/view-part/?ref=snap
J1: "Conn Data USB Micro B w/Flange SMT Bottom Mnt LF", Package=None, Check_prices=https://www.snapeda.com/parts/47346-0001/Molex/view-part/?ref=eda, MF=Molex, MP=47346-0001, SnapEDA_Link=https://www.snapeda.com/parts/47346-0001/Molex/view-part/?ref=snap
J2: "Connector Header Surface Mount, Right Angle 6 position 0.049 (1.25mm)", Package=None, Check_prices=https://www.snapeda.com/parts/SM06B-GHS-TB/JST/view-part/?ref=eda, MF="JST Sales", MP=SM06B-GHS-TB, SnapEDA_Link=https://www.snapeda.com/parts/SM06B-GHS-TB/JST/view-part/?ref=snap
J3: "Cbl Plug-Of-Nails 10-Pin w/Legs", Package=None, Availability=Unavailable, MP=TC2050-IDC, Price=None
L1: "FERRITE BEAD 60 OHM 0805 1LN", Package="0805 Wurth Elektronik", Check_prices=https://www.snapeda.com/parts/742792063/W%25C3%25BCrth+Elektronik+Midcom/view-part/?ref=eda, MF="WÃ¼rth Elektronik", MP=742792063, SnapEDA_Link=https://www.snapeda.com/parts/742792063/W%25C3%25BCrth+Elektronik+Midcom/view-part/?ref=snap
R1 R2 R3 R4: library part CR0402AFX-1002GAS, "Resistor, AS 0402 1k 1% 63mW TC100", Package="0402-2 Bourns", Check_prices=https://www.snapeda.com/parts/CR0402AFX-1002GAS/Bourns/view-part/?ref=eda, MF=Bourns, MP=CR0402AFX-1002GAS, SnapEDA_Link=https://www.snapeda.com/parts/CR0402AFX-1002GAS/Bourns/view-part/?ref=snap
R5 R7: library part CR0402AFX-1002GAS, "Resistor, AS 0402 10k 1% 63mW TC100", Package="0402-2 Bourns", Check_prices=https://www.snapeda.com/parts/CR0402AFX-1002GAS/Bourns/view-part/?ref=eda, MF=Bourns, MP=CR0402AFX-1002GAS, SnapEDA_Link=https://www.snapeda.com/parts/CR0402AFX-1002GAS/Bourns/view-part/?ref=snap
R6: library part CR0402AFX-1002GAS, "Resistor, AS 0402 0R 1% 63mW TC100", Package="0402-2 Bourns", Check_prices=https://www.snapeda.com/parts/CR0402AFX-1002GAS/Bourns/view-part/?ref=eda, MF=Bourns, MP=CR0402AFX-1002GAS, SnapEDA_Link=https://www.snapeda.com/parts/CR0402AFX-1002GAS/Bourns/view-part/?ref=snap
U1: "Linear Voltage Regulator IC Positive Fixed 1 Output 1A SOT-223-3L", Package="SOT-223-3L UMW", Check_prices=https://www.snapeda.com/parts/AMS1117-3.3/UMW/view-part/?ref=eda, MF=UMW, MP=AMS1117-3.3, SnapEDA_Link=https://www.snapeda.com/parts/AMS1117-3.3/UMW/view-part/?ref=snap
U2: "High-performance access line, ARM Cortex-M4 core with DSP and FPU, 512 Kbytes Flash, 100 MHz CPU, ART Accelerator", Package=None, Availability=Unavailable, MP=STM32F411CEU6, Price=None
U3: Package=None, Check_prices=https://www.snapeda.com/parts/MPU-6050-A/InvenSense/view-part/?ref=eda, MF="TDK InvenSense", MP=MPU-6050-A, SnapEDA_Link=https://www.snapeda.com/parts/MPU-6050-A/InvenSense/view-part/?ref=snap
Y1: "24 MHz Â±20ppm Crystal 6pF 80 Ohms 4-SMD, No Lead", Package="ECX-1637-37-4 ECS", Check_prices=https://www.snapeda.com/parts/ECS-240-6-37-JTN-TR/ECS/view-part/?ref=eda, MF="ECS Inc.", MP=ECS-240-6-37-JTN-TR, SnapEDA_Link=https://www.snapeda.com/parts/ECS-240-6-37-JTN-TR/ECS/view-part/?ref=snap

## Free pads (board coordinates)
  round 2.375 hole 2.375 unplated: 1(63,87.6) 2(62.9,51.75) 3(103.95,51.75) 4(104.025,87.575)

## Via types
v1: diameter 0.7, hole 0.3, Top Layer to Bottom Layer, 20 vias

## Nets (pads, with @x,y where several pads share a name; then routed paths per layer and width w, separated by ;. In a path a pad name is that pad's centre, name@x,y a point inside that pad or via, vN(x,y) a via of type N, cw(c..) or ccw(c..) an arc to the next point about the centre after c; other vN are vias at no path point)
+3v3: C4.2 C9.2 C10.1 C11.1 C12.1 C13.1 C14.1 C15.1 C18.1 D1.1 J2.1 J3.1 R2.1 R3.1 R5.2 U1.2 U1.4 U2.1 U2.9 U2.24 U2.36 U2.48 U3.8 U3.13 | length 187.8
  Top Layer w0.2: U3.8 68.765,81.345 68.409,81.345 68.033,81.721 68.033,81.774 67.75,82.057 68.201,82.057 73.504,87.36 86.157,87.36 R5.2 ; C11.1 75.78,66.768 76.525,67.513 76.525,67.95 76.923,68.348 U2.9 ; C14.1 77.93,74.518 78.238,74.21 U2.48
  Top Layer w0.25: C10.1 75.4,72.682 76.924,72.682 77.258,72.348 U2.1
  Top Layer w0.3: C15.1 67.15,84.244 70.266,87.36 73.504,87.36 ; U3.13 69.525,77.15 C18.1 70.043,74.92 v1(69.698,74.574) ; J2.1 73.825,53.146 73.998,52.973 79.789,52.973 79.902,53.086 84.531,53.086 85.432,53.987 85.432,59.333 ; C9.2 74.473,72.95 74.766,72.657 C10.1 ; C11.1@75.78,66.768 76.158,66.768 v1(76.759,66.167) ; v1(76.987,74.219) 77.9,74.219 C14.1 ; U2.1 77.902,72.348 77.902,72.695 78.238,72.695 U2.48 ; R2.1 80.848,77.14 80.873,77.115 R3.1 v1(81.55,76.302) ; U2.24 83.738,66.182 83.753,66.197 85.697,66.197 v1(85.725,66.225) ; U2.36 84.688,72.348 84.938,72.598 84.938,72.745 85.15,72.957 C13.1 ; v1(85.432,64.756) C12.1 ; v1(85.9,74.219) C13.1 ; v1(86.157,86.538) 86.157,87.36 ; v1(88.544,72.957) v1(87.274,72.957) C13.1 ; U1.2 91.675,61.824 89.749,63.75 C12.1 ; v1(92.325,76.302) J3.1 ; C4.2 96.55,56.65 97.5,55.7 ; D1.1 97.5,55.7 ; 85.432,59.333 C12.1 ; 85.432,59.333 90.71,54.055 U1.4 93.955,54.055 95.6,55.7 97.5,55.7
  Int1 (GND) w0.254: v1(69.698,74.574) 76.632,74.574 v1(76.987,74.219) 80.467,74.219 ; v1(81.55,76.302) 81.55,75.302 80.467,74.219 ; v1(85.9,74.219) 80.467,74.219
  Int2 (PWR) w0.254: v1(76.759,66.167) 81.754,66.167 v1(88.544,72.957) 88.544,71.635 ; v1(85.432,64.756) 85.432,64.876 85.725,65.17 85.725,67.276 85.42,67.581 85.42,68.511 88.544,71.635 ; v1(86.157,86.538) 86.157,74.075 v1(87.274,72.957) ; v1(92.325,76.302) 92.325,75.416 88.544,71.635
+5: C2.2 C3.2 L1.2 U1.3 | length 15.9
  Top Layer w0.25: L1.2 97.225,67.625 C2.2
  Top Layer w0.3: U1.3 89.385,60.555 90.619,59.321 92.149,59.321 92.975,60.147 92.975,64.335 93.49,64.85 C3.2 96.025,64.85 C2.2
GND: C1.1 C2.1 C3.1 C4.1 C5.1 C6.1 C7.1 C8.2 C9.1 C10.2 C11.2 C12.2 C13.2 C14.2 C15.2 C16.2 C17.2 C18.2 J1.5 J2.6 J3.5 R1.1 R4.1 R7.1 U1.1 U2.8 U2.23 U2.35 U2.47 U2.49 U3.1 U3.9 U3.11 U3.18 U3.22 Y1.2 Y1.4 | length 243.1
  Top Layer w0.2: C5.1 70,64.7 70.425,64.275 Y1.4 70.525,64.275 70.973,63.827 71.152,63.827 71.306,63.673 71.327,63.673 71.775,63.225 Y1.2 ; U2.8 80.238,68.848 U2.49
  Top Layer w0.25: C16.2 C15.2 67.18,81.193 67.568,80.805 68.123,80.805 U3.9 ; U3.18 72.025,78.33 72.355,78 v1(73.304,78) C17.2 ; C14.2 77.93,75.382 78.272,75.04 78.304,75.04 78.624,74.72 79.045,74.72 R7.1 79.2,73.91 78.748,73.458 78.748,73.038 U2.47 ; C8.2 82.85,62.8 83.642,63.592 83.8,63.75 C12.2
  Top Layer w0.3: C16.2 66.697,80.007 66.573,79.883 66.573,78.588 67.945,77.216 67.945,74.778 68.904,73.818 69.948,73.818 70.907,74.778 ; 68.123,80.805 68.123,79.805 U3.11 ; C5.1 71.152,65.875 71.227,65.8 C6.1 ; Y1.2 71.825,62.789 71.596,62.56 68.699,62.56 67.462,63.797 67.462,69.037 69.675,71.25 73.095,71.25 ; U3.18@72.025,78.33 72.025,77.673 71.502,77.15 C18.2 70.907,74.778 ; U3.22 74.778,80.805 75.193,80.39 75.193,78.212 74.981,78 ; v1(72.873,82.652) U3.1@72.025,82.652 ; v1(72.949,82.525) U3.1 U3.1@72.025,82.652 ; C9.1 73.095,71.25 ; C17.2 74.981,78 ; U2.8 76.498,68.848 75.75,68.1 C11.2 75.75,67.513 75.623,67.386 75.387,67.386 75.159,67.158 75.159,61.925 74.447,61.214 74.447,53.473 79.426,53.473 80.075,54.122 J2.6 80.075,59.975 ; C14.2 77.9,77.316 77.216,78 74.981,78 ; v1(80.086,60.808) 80.075,60.796 80.075,59.975 ; U2.23 83.238,65.606 83.642,65.202 83.642,63.592 83.642,62.992 83.4,62.75 C8.2 80.075,59.975 ; U2.35 85.259,71.848 85.504,72.093 C13.2 89.009,72.093 89.256,72.339 v1(89.256,73.635) ; C12.2 84.568,65.024 85,65.456 87.275,65.456 R4.1 90.382,65.515 93.624,68.758 97.739,68.758 98.019,68.478 98.019,64.618 97.751,64.35 C2.1 ; C3.1 C3.1@93.965,63.15 ; J3.5 94.865,81.589 91.77,84.684 89.408,84.684 88.775,85.317 C7.1 87.416,86.425 85.192,84.201 73.152,84.201 72.025,83.074 U3.1@72.025,82.652 ; C4.1 96.55,58.45 98.66,60.56 ; R1.1 98.66,60.56 ; J1.5 103.504,71.125 103.65,70.979 103.65,64.895 103.105,64.35 C1.1 98.069,64.35 98.058,64.338 97.225,64.338 C2.1 ; 70.907,74.778 70.907,73.438 73.095,71.25 ; C3.1@93.965,63.15 93.965,63.315 95,64.35 C2.1 ; C3.1@93.965,63.15 93.965,61.966 U1.1 93.965,60.56 98.66,60.56
  Top Layer w0.5: C9.1 73.875,71.3 74.393,71.818 75.4,71.818 C10.2
  Int1 (GND) w0.254: v1(72.949,82.525) 72.949,78.356 v1(73.304,78) ; v1(80.086,60.808) 80.086,66.862 86.859,73.635 v1(89.256,73.635)
  Int2 (PWR) w0.254: v1(72.873,82.652) 72.873,68.021 v1(80.086,60.808)
IMU_CPOUT: C17.1 U3.20 | length 1.7
  Top Layer w0.2: U3.20 73,79.805 73.105,79.7 C17.1
IMU_INT: U2.45 U3.12 | length 18.5
  Top Layer w0.3: U3.12 68.885,79.305 v1(68.885,75.844) ; U2.45 79.738,73.744 80.01,74.016 80.01,75.362 v1(80.594,75.362)
  Int1 (GND) w0.254: v1(68.885,75.844) 78.537,75.844 79.019,75.362 v1(80.594,75.362)
IMU_REGOUT: C16.1 U3.10 | length 2.8
  Top Layer w0.3: C16.1 68.123,79.143 68.123,80.305 U3.10
IMU_SCL: R2.2 U2.42 U3.23 | length 14.9
  Top Layer w0.2: U3.23 75.329,81.305 78.624,78.01 R2.2 ; U2.42 81.238,73.738 81.824,74.324 82.309,74.324 82.309,74.809 84.837,77.337
IMU_SDA: R3.2 U2.43 U3.24 | length 19.3
  Top Layer w0.2: U3.24 75.395,81.805 78,79.2 81.55,79.2 ; U2.43 80.738,73.328 80.838,73.428 80.838,73.904 83.125,76.191 83.125,78.296 82.454,78.296 81.55,79.2 ; R3.2 81.55,79.2
MCU_A: D2.A U2.26 | length 1.9
  Top Layer w0.25: U2.26 85.898,67.348 D2.A
MCU_Boot0: R7.2 U2.44 | length 3.2
  Top Layer w0.2: R7.2 79.22,75.435 79.575,75.08 79.586,75.08 79.695,74.971 80.238,74.971 U2.44
MCU_k: D2.C R4.2 | length 1.5
  Top Layer w0.2: R4.2 87.275,67.075 D2.C
MCU_nrst: C7.2 J3.3 R5.1 U2.7 | length 99.9
  Top Layer w0.2: C7.2 90.54,86.49 R5.1
  Top Layer w0.3: U2.7 76.097,69.348 74.574,67.826 74.574,62.785 73.74,61.951 66.802,61.951 66.167,62.586 66.167,78.002 66.073,78.096 66.073,84.183 69.825,87.935 97.765,87.935 97.765,86.719 97.585,86.539 ; J3.3 94.865,79.35 94.209,78.693 94.209,77.114 95.098,76.225 97.79,76.225 98.781,77.216 98.781,85.344 97.585,86.539 ; 97.585,86.539 97.536,86.49 R5.1 97.585,86.539
MCU_OSC_IN: C5.2 U2.5 Y1.1 | length 22.4
  Top Layer w0.3: C5.2 68.35,65.875 69.164,66.689 ; Y1.1 69.744,63.225 69.164,63.805 69.164,66.689 ; U2.5 72.823,70.348 ; 69.164,66.689 72.823,70.348 ; 69.164,66.689 69.164,69.52 69.992,70.348 72.823,70.348
MCU_OSC_OUT: R6.1 U2.6 | length 5.4
  Top Layer w0.2: R6.1 73.575,69.35 73.692,69.467 75.259,69.467 75.64,69.848 U2.6
MCU_PA4: J2.2 U2.14 | length 13.1
  Top Layer w0.3: J2.2 75.075,60.906 76.356,62.187 76.356,63.081 78.738,65.463 U2.14
MCU_PA5: J2.3 U2.15 | length 12.8
  Top Layer w0.3: J2.3 76.325,61.156 79.238,64.069 U2.15
MCU_PA6: J2.4 U2.16 | length 12.5
  Top Layer w0.25: J2.4 77.575,61.725 79.738,63.888 U2.16
MCU_PA7: J2.5 U2.17 | length 12.2
  Top Layer w0.25: J2.5 78.825,61.65 80.238,63.063 U2.17
MCU_SWCLK: J3.4 U2.37 | length 15.9
  Top Layer w0.3: U2.37 83.738,74.473 v1(89.129,79.863) ; v1(93.239,82.194) 93.595,81.839 J3.4
  Int1 (GND) w0.254: v1(89.129,79.863) 89.129,80.874 89.764,81.509 90.78,81.509 91.465,82.194 v1(93.239,82.194)
MCU_SWDIO: J3.2 U2.34 | length 17.1
  Top Layer w0.3: U2.34 92.405,71.348 93.595,72.538 J3.2
MCU_SWO: J3.6 U2.39 | length 14.1
  Top Layer w0.25: U2.39 82.738,74.288 85.425,76.975 85.425,77.136 89.839,81.55 92.066,81.55 92.325,81.291 J3.6
MCU_VCAP!: C8.1 U2.22 | length 1.9
  Top Layer w0.3: U2.22 82.738,65.812 82.658,65.812 82.658,64.642 C8.1
NetD1_2: D1.2 R1.2 | length 1.7
  Top Layer w0.25: D1.2 99,58.1 R1.2
USB_D_N: J1.2 U2.32 | length 18.5
  Top Layer w0.26: U2.32 85.406,70.348 86.479,69.275 102.315,69.275 J1.2
USB_D_P: J1.3 U2.33 | length 18.4
  Top Layer w0.26: U2.33 86.69,70.848 87.713,69.825 J1.3
VBUS: C1.2 J1.1 L1.1 | length 5.2
  Top Layer w0.25: C1.2 99.475,66.4 L1.1 99.675,67.975 100.225,68.525 J1.1
XTAL_IN: C6.2 R6.2 Y1.3 | length 3.8
  Top Layer w0.2: Y1.3 71.875,64.275 73,65.4 73.125,65.4 C6.2 73.575,65.85 R6.2
pads on no net: C19.1 C19.2 J1.4 J1.S1 J1.S2 J1.S3 J1.S4 J1.S5 J1.S6 J2.MP1 J2.MP2 J3. U2.2 U2.3 U2.4 U2.10 U2.11 U2.12 U2.13 U2.18 U2.19 U2.20 U2.21 U2.25 U2.27 U2.28 U2.29 U2.30 U2.31 U2.38 U2.40 U2.41 U2.46 U3.2 U3.3 U3.4 U3.5 U3.6 U3.7 U3.14 U3.15 U3.16 U3.17 U3.19 U3.21
copper on no net: | length 167.7
  Top Layer w0.25: 78.238,65.868 78.238,66.168
  Top Layer w0.254: 60.3,89.15 60.3,53.045 ccw(c63.366,53.045) 61.198,50.877 ccw(c62.712,52.391) 62.712,50.25 103.605,50.25 ccw(c103.605,53.316) 105.773,51.148 105.852,51.227 ccw(c103.684,53.395) 106.75,53.395 106.75,85.905 ccw(c103.684,85.905) 105.852,88.073 104.723,89.202 ccw(c102.555,87.034) 102.555,90.1 62.52,90.1 ccw(c62.52,87.034) 60.352,89.202

## Text inside footprints (layer, text, board x,y; h text height)
J1: Mechanical 13 "PCB EDGE" at 106.325,74.325 h0.41 r90